# Altium PCB H-Bridge.PcbDoc
Units mil, origin at the board's own origin, x right, y up, seen from the top; angles counter-clockwise.
Board outline 2080 x 1560 mil, 2 copper layers (Top Layer, Bottom Layer); 17 components, 13 nets, 53 pads, 4 vias.
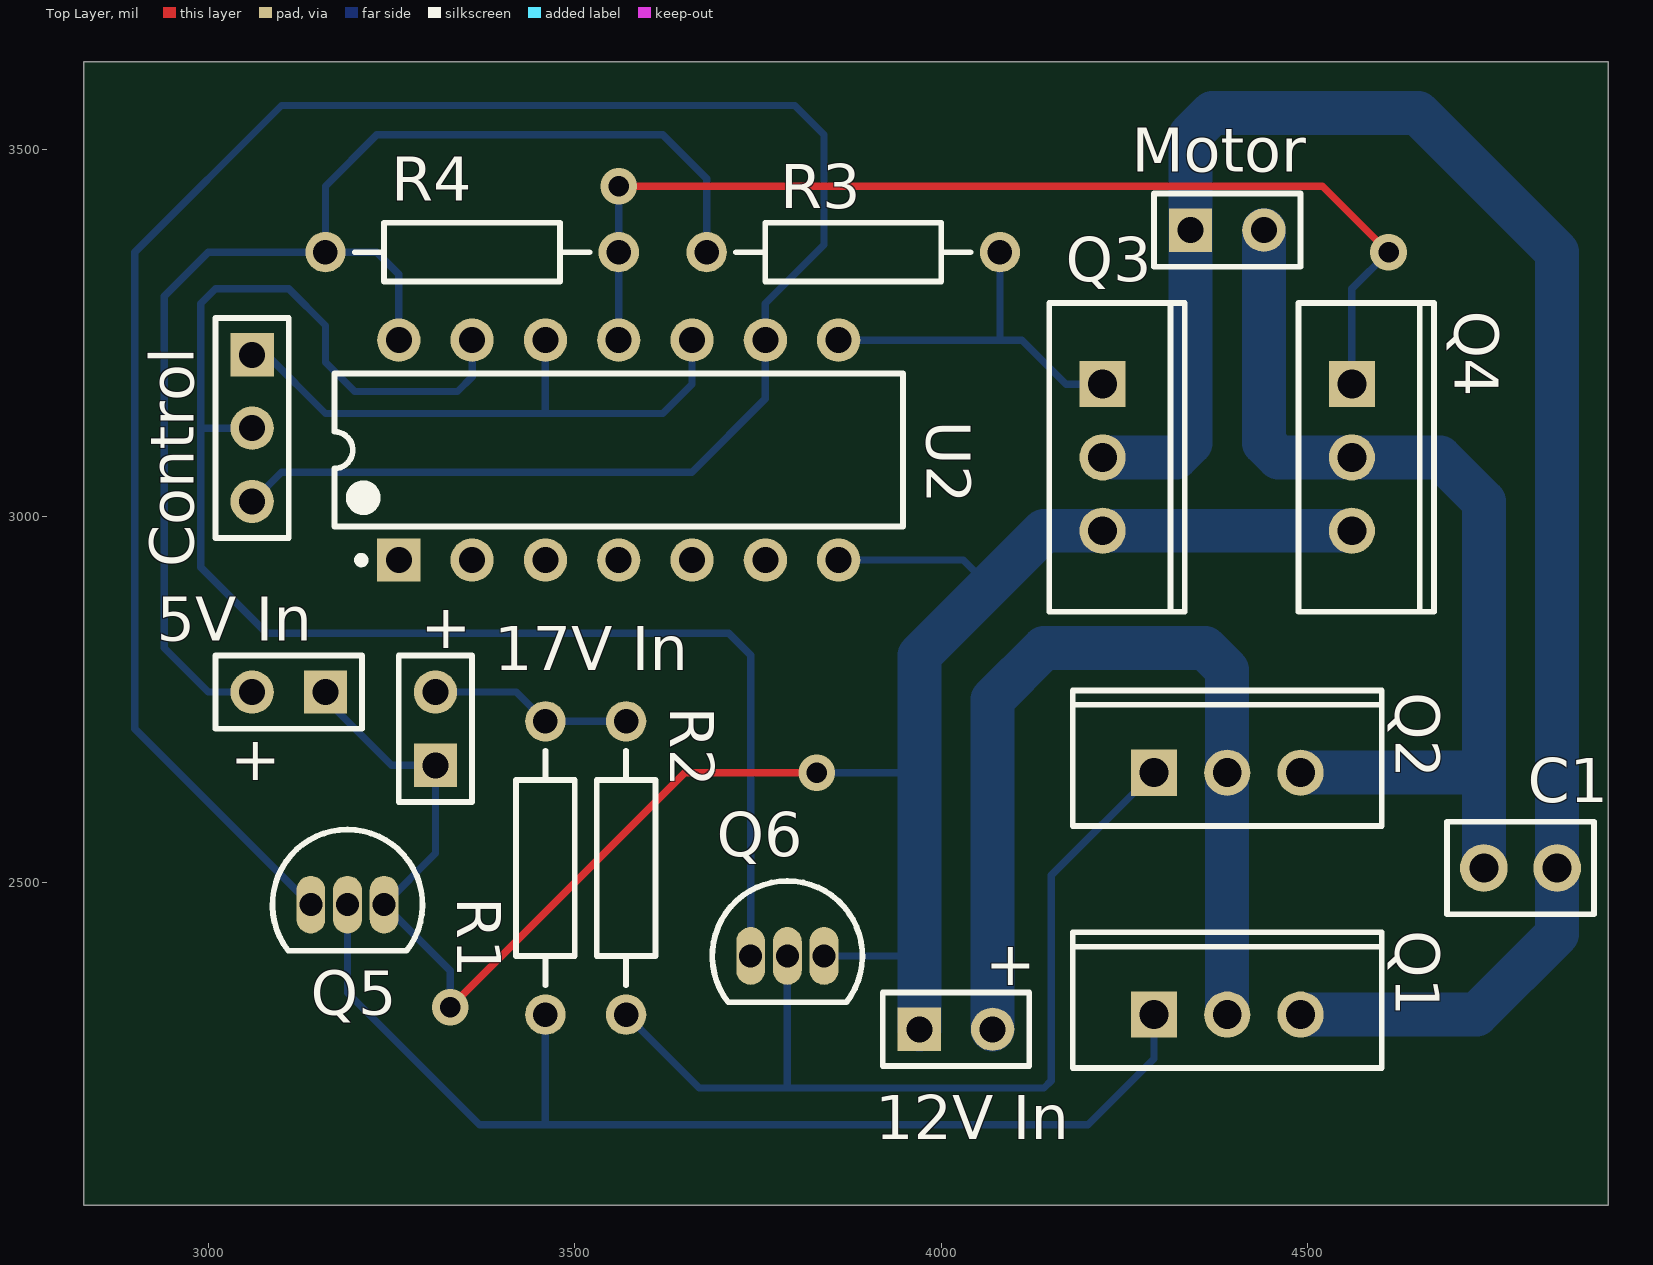
[diagram p0: Top Layer view]
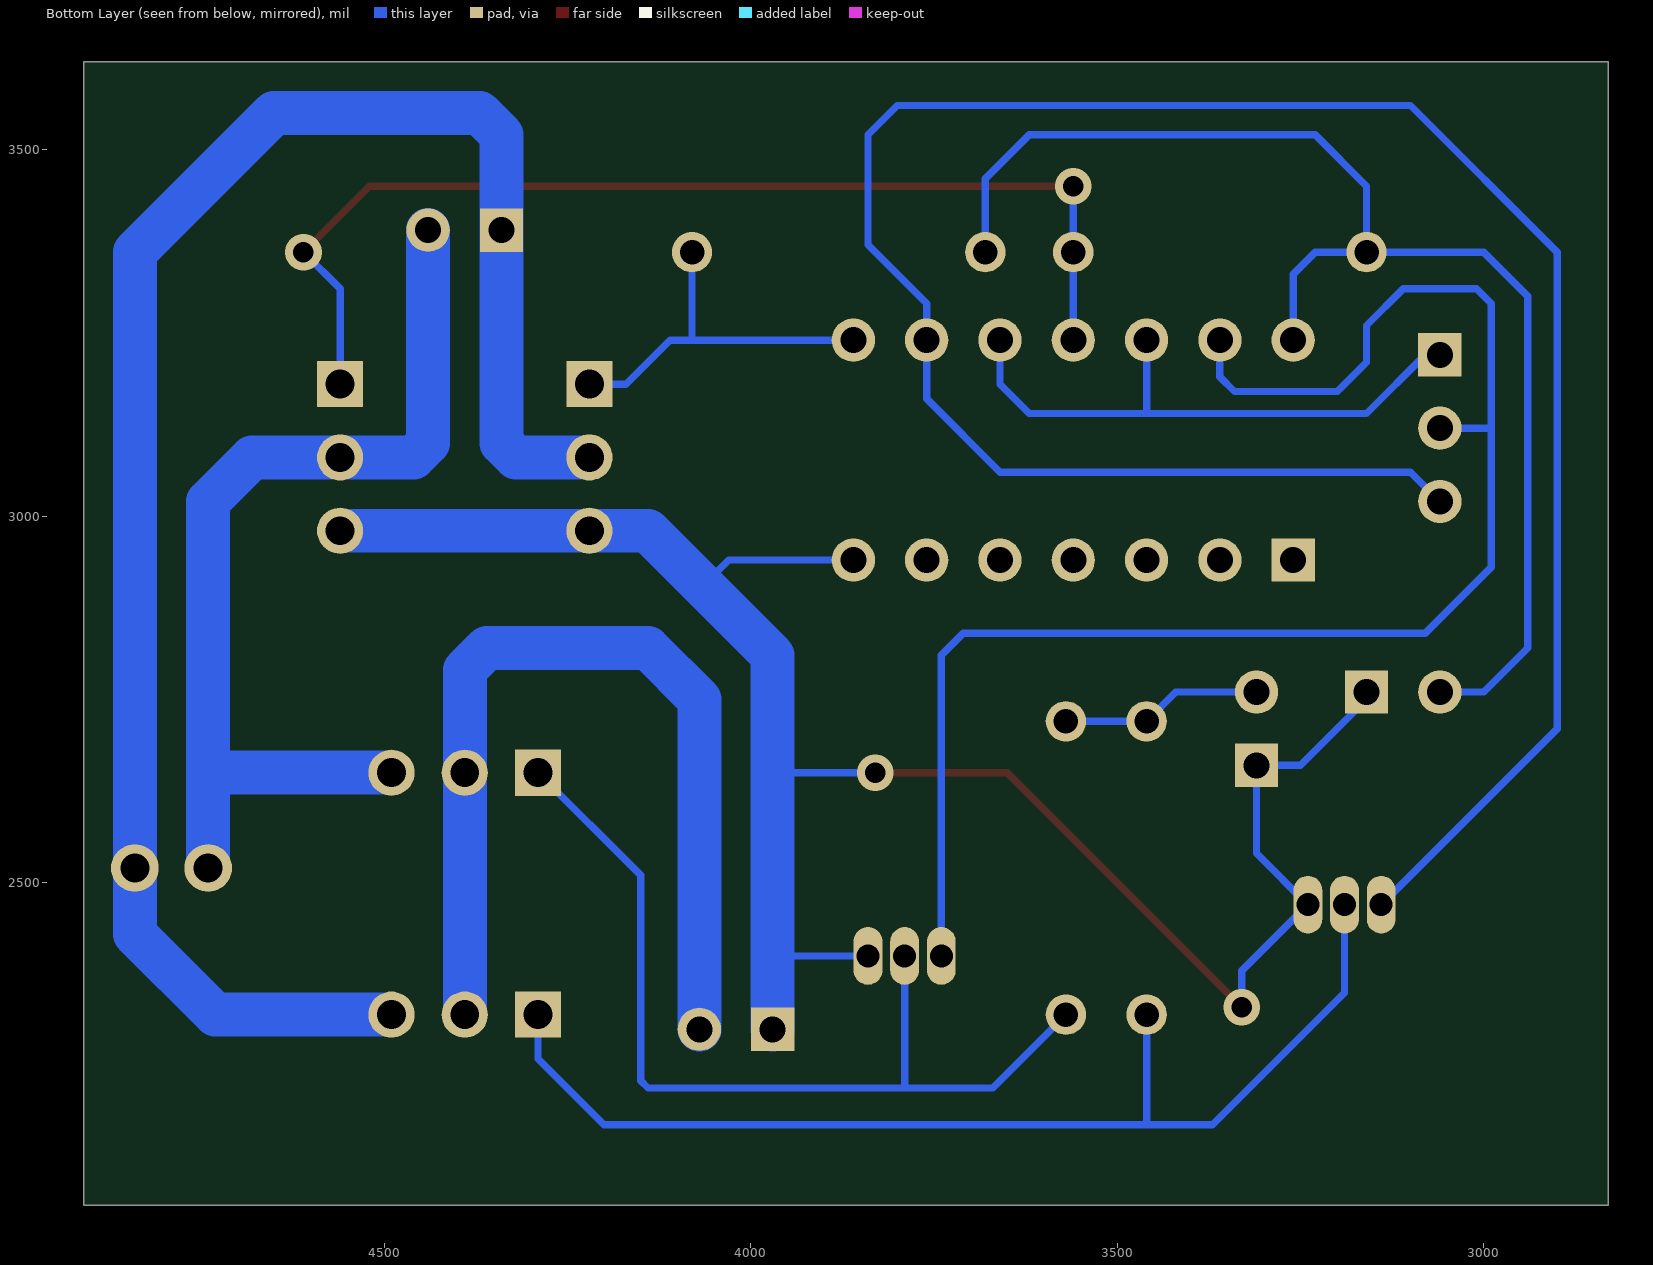
[diagram p1: Bottom Layer view, seen from below]

## Layer stack, top to bottom
Top Layer: signal copper 1.4
Dielectric: dielectric 12.6, FR-4, Dk 4.8
Bottom Layer: signal copper 1.4

## Board outline
2830,3620 4910,3620 4910,2060 2830,2060

## Design rules (kind name [scope] priority, off if disabled: settings)
Clearance [All] p1: gap=10
PolygonConnect [All] p1: connectstyle=Relief reliefconductorwidth=10 reliefentries=4 polygonreliefangle="90 Angle"
RoutingVias [All] p1: holewidth=28 width=50 viastyle="Through Hole" minholewidth=28 minwidth=50 maxholewidth=28 maxwidth=50
SilkscreenOverComponentPads [All] p1: minsilkscreentomaskgap=10
SolderMaskExpansion [All] p1: expansion=4
Width [All] p1 off: maxlimit=10 minlimit=10 preferedwidth=10
27 further rules are at their usual default settings.

## Components (designator, comment, footprint, x,y, rotation, side; value= is the part's Value field where it differs from the comment)
"5V In" "Header 2" HDR1X2 3160,2760 r180 top
"12V In" "Header 2" HDR1X2 3970,2300 r0 top
"17V In" "Header 2" HDR1X2 3310,2660 r90 top
C1 "Cap" CAPR2.54-5.1x3.2 4790,2520 r180 top
Control "Header 3" HDR1X3 3060,3220 r270 top
Motor "Header 2" HDR1X2 4340,3390 r0 top
Q1 "IRF3205" TO-220AB 4390,2320 r0 top
Q2 "IRF3205" TO-220AB 4390,2650 r0 top
Q3 "IRF3205" TO-220AB 4220,3080 r270 top
Q4 "IRF3205" TO-220AB 4560,3080 r270 top
Q5 "2SK649" TO-92 3190,2470 r270 top
Q6 "2SK649" TO-92 3790,2400 r270 top
R1 "Res2" AXIAL-0.4 3460,2520 r270 top
R2 "Res2" AXIAL-0.4 3570,2520 r270 top
R3 "Res2" AXIAL-0.4 3880,3360 r0 top
R4 "Res2" AXIAL-0.4 3360,3360 r180 top
U2 "DM74S09N" N14A 3560,3090 r90 top

## Footprints (in the part's own frame and the unit in brackets; to place one, negate y for a bottom-side part, rotate by r counter-clockwise, add the part's x,y. Pads: shape width x height; smd on the part's side, far side on the other; paste and mask are expansions set on the pad)
AXIAL-0.4 [mm] "Axial Device, Thru-Hole; 2 Leads; 0.4 in Pin Spacing"
  round 1.4 hole 0.85: 1(-5.08,0) 2(5.08,0)
  silkscreen extent -4.06,-1.02 4.06,1.02
CAPR2.54-5.1x3.2 [mm] "Capacitor, Ceramic, Thru-Hole, Dipped Radial; Body 5.1 x 3.2 mm (WxT) Pin Spacing 2.54 mm (typ)"
  round 1.65 hole 1: 1(-1.27,0) 2(1.27,0)
  silkscreen extent -2.55,-1.6 2.55,1.6
HDR1X2 [mm] "Connector; Header; 2 Position"
  rect 1.5x1.5 hole 0.9: 1(0,0)
  round 1.5 hole 0.9: 2(2.54,0)
  silkscreen extent -1.27,-1.27 3.81,1.27
HDR1X3 [mm] "Connector; Header; 3 Position"
  rect 1.5x1.5 hole 0.9: 1(0,0)
  round 1.5 hole 0.9: 2(2.54,0) 3(5.08,0)
  silkscreen extent -1.27,-1.27 6.35,1.27
N14A [mm] "DIP, 14-Leads, Row Spacing 7.62mm, Pitch 2.54mm, Body 19.18x6.35mm"
  rect 1.5x1.5 hole 0.9: 1(-3.81,7.62)
  round 1.5 hole 0.9: 2(-3.81,5.08) 3(-3.81,2.54) 4(-3.81,0) 5(-3.81,-2.54) 6(-3.81,-5.08) 7(-3.81,-7.62) 8(3.81,-7.62) 9(3.81,-5.08) 10(3.81,-2.54) 11(3.81,0) 12(3.81,2.54) 13(3.81,5.08) 14(3.81,7.62)
  silkscreen extent -3.93,-9.85 2.65,9.85, body extent -3.55,-9.85 3.55,9.85, height 5.08
TO-92 [mm] "TO, Flat Index; 3 In-Line, Axial Leads; Body Dia. 5.1mm; Leads 0.48 x 0.48 mm (max)"
  oval 2x1 hole 0.8: 1(0,-1.27) 2(0,0) 3(0,1.27)
  silkscreen extent -2.6,-2.6 1.6,2.6
TO-220AB [mm] "TO, Thru-Hole, Vertical, Heatsink Mounted; 3 In-Line Leads; Pitch 2.54 mm"
  rect 1.6x1.6 hole 1: 1(-2.54,0)
  round 1.6 hole 1: 2(0,0) 3(2.54,0)
  silkscreen extent -5.35,-1.85 5.35,2.85

## Part data
"5V In" "12V In" "17V In" Motor: "Header, 2-Pin"
C1: "Capacitor"
Control: "Header, 3-Pin"
Q1 Q2 Q3 Q4: "HEXFET Power MOSFET"
Q5 Q6: "N channel MOSFET"
R1 R2 R3 R4: "Resistor"
U2: "Quad 2-Input AND Gate with Open-Collector Output, 14-Pin PDIP"

## Via types
v1: diameter 50, hole 28, Top Layer to Bottom Layer, 4 vias

## Nets (pads, with @x,y where several pads share a name; then routed paths per layer and width w, separated by ;. In a path a pad name is that pad's centre, name@x,y a point inside that pad or via, vN(x,y) a via of type N, cw(c..) or ccw(c..) an arc to the next point about the centre after c; other vN are vias at no path point)
12V: "12V In.2" Q1.2 Q2.2 | length 1281.4
  Bottom Layer w60: 4070,2300 4070,2750 4140,2820 4360,2820 4390,2790 Q2.2 Q1.2
17V: "17V In.2" R1.1 R2.1 | length 276.6
  Bottom Layer w10: 3310,2760 3420,2760 R1.1 R2.1
!DIRECTION: Control.3 Q5.1 U2.9 | length 3179.9
  Bottom Layer w10: Control.3 3100,3060 3660,3060 3760,3160 U2.9 3760,3290 3840,3370 3840,3520 3800,3560 3100,3560 2900,3360 2900,2710 Q5.1
DIRECTION: Control.2 Q6.1 U2.13 | length 2163.6
  Bottom Layer w10: Control.2 2990,3120 ; U2.13 3360,3190 3340,3170 3200,3170 3160,3210 3160,3260 3110,3310 3010,3310 2990,3290 2990,3120 ; Q6.1 3740,2810 3710,2840 3080,2840 2990,2930 2990,3120
GND: "5V In.1" "12V In.1" "17V In.1" Q3.3 Q4.3 Q5.3 Q6.3 U2.7 | length 2876
  Top Layer w10: v1(3330,2330) 3650,2650 v1(3830,2650)
  Bottom Layer w10: 3160,2760 3160,2750 3250,2660 3310,2660 3310,2550 3310,2540 Q5.3 3330,2380 v1(3330,2330) ; v1(3830,2650) 3970,2650 ; Q6.3 3960,2400 ; U2.7 4030,2940 4065,2905
  Bottom Layer w60: 3970,2300 3970,2650 3970,2810 4065,2905 4140,2980 Q3.3 Q4.3
NetC1_1: C1.1 Motor.1 Q1.3 Q3.2 | length 2465
  Bottom Layer w60: Q3.2 4320,3080 4340,3100 Motor.1 4340,3520 4370,3550 4650,3550 4840,3360 4840,2430 4730,2320 Q1.3
NetC1_2: C1.2 Motor.2 Q2.3 Q4.2 | length 1363.1
  Bottom Layer w60: Motor.2 4440,3100 4460,3080 Q4.2 4680,3080 4740,3020 4740,2700 C1.2@4740,2530 ; Q2.3 4740,2650
NetQ1_1: Q1.1 Q5.2 R1.2 | length 1541.8
  Bottom Layer w10: Q5.2 3190,2350 3370,2170 3460,2170 ; R1.2 3460,2170 ; Q1.1 4290,2260 4200,2170 3460,2170
NetQ2_1: Q2.1 Q6.2 R2.2 | length 1283.6
  Bottom Layer w10: R2.2 3670,2220 3790,2220 ; Q6.2 3790,2220 ; Q2.1 4150,2510 4150,2230 4140,2220 3790,2220
NetQ3_1: Q3.1 R3.2 U2.8 | length 504.9
  Bottom Layer w10: U2.8 4080,3240 ; R3.2 4080,3240 ; Q3.1 4170,3180 4110,3240 4080,3240
NetQ4_1: Q4.1 R4.1 U2.11 | length 1498
  Top Layer w10: v1(3560,3450) 4520,3450 v1(4610,3360)
  Bottom Layer w10: U2.11 v1(3560,3450) ; Q4.1 4560,3310 v1(4610,3360)
PWM: Control.1 U2.10 U2.12 | length 809.7
  Bottom Layer w10: Control.1 3080,3220 3160,3140 3460,3140 ; U2.12 3460,3140 ; U2.10 3660,3180 3620,3140 3460,3140
VCC: "5V In.2" R3.1 R4.2 U2.14 | length 1836
  Bottom Layer w10: 3060,2760 3000,2760 2940,2820 2940,3300 3000,3360 3230,3360 3260,3330 U2.14 ; R4.2 3160,3450 3230,3520 3620,3520 3680,3460 R3.1
pads on no net: U2.1 U2.2 U2.3 U2.4 U2.5 U2.6

## Silkscreen, mask and mechanical layers (free items; w line width, h text height)
Top Overlay:
  text "+" at 3290,2820 h60
  text "+" at 3030,2640 h60
  text "+" at 4060,2360 h60